# EAGLE board CT_schematic (EAGLE 7.6.0)

Size 100 x 80 mm. Coordinates in mm from the lower left corner, seen from the top.
Outline: 0,0 100,0 100,80 0,80 0,0
Copper layers (1*16): Top 0.035mm / dielectric 1.5mm / Bottom 0.035mm
Design rules "default": minimum track width 10mil, minimum drill 24mil, track to track 8mil, track to pad 8mil, pad to pad 8mil, via to via 8mil, smd to smd 8mil, copper to edge 40mil, drill to drill 8mil, minimum pad ring 10mil, minimum via ring 8mil, stop-mask expansion 4mil, vias tented up to drill 0mil, thermal gap 10mil

## Footprints (pad centres in the part's own frame; a part is rotated, then mirrored left to right if it is on the bottom)
C0603 = smd 0.8 x 0.8: 1 -0.762,0; 2 0.762,0
C0402 = smd 0.5 x 0.5: 1 -0.508,0; 2 0.508,0
C1210 = smd 1.2 x 2.5: 1 -1.524,0; 2 1.524,0
C0805 = smd 1.2 x 1.3: 1 -1.016,0; 2 1.016,0
EXV-9B = smd 2.718 x 1.778: 1 -2.108,0; 2 2.108,0
EXV-9H = smd 3.505 x 1.676: 1 -2.857,0; 2 2.857,0
L0603 = smd 0.8 x 0.8: 1 -0.762,0; 2 0.762,0
PJ-037B_PACKAGE = drill 3.7 square: 1 12,0 | drill 3.2 square: 2 6,0
R0603 = smd 0.8 x 0.8: 1 -0.762,0; 2 0.762,0
WLCSP66 = smd 0.229 x 0.229: A1 -1.6,1.6; A2 -1.2,1.6; A3 -0.8,1.6; A4 -0.4,1.6; A5 0,1.6; A6 0.4,1.6; A7 0.8,1.6; A8 1.2,1.6; A9 1.6,1.6; B1 -1.6,1.2; B2 -1.2,1.2; B3 -0.8,1.2; B4 -0.4,1.2; B5 0,1.2; B6 0.4,1.2; B7 0.8,1.2; B8 1.2,1.2; B9 1.6,1.2; C1 -1.6,0.8; C2 -1.2,0.8; C3 -0.8,0.8; C7 0.8,0.8; C8 1.2,0.8; C9 1.6,0.8; D1 -1.6,0.4; D2 -1.2,0.4; D3 -0.8,0.4; D7 0.8,0.4; D8 1.2,0.4; D9 1.6,0.4; E1 -1.6,0; E2 -1.2,0; E3 -0.8,0; E7 0.8,0; E8 1.2,0; E9 1.6,0; F1 -1.6,-0.4; F2 -1.2,-0.4; F3 -0.8,-0.4; F7 0.8,-0.4; F8 1.2,-0.4; F9 1.6,-0.4; G1 -1.6,-0.8; G2 -1.2,-0.8; G3 -0.8,-0.8; G7 0.8,-0.8; G8 1.2,-0.8; G9 1.6,-0.8; H1 -1.6,-1.2; H2 -1.2,-1.2; H3 -0.8,-1.2; H4 -0.4,-1.2; H5 0,-1.2; H6 0.4,-1.2; H7 0.8,-1.2; H8 1.2,-1.2; H9 1.6,-1.2; J1 -1.6,-1.6; J2 -1.2,-1.6; J3 -0.8,-1.6; J4 -0.4,-1.6; J5 0,-1.6; J6 0.4,-1.6; J7 0.8,-1.6; J8 1.2,-1.6; J9 1.6,-1.6
SAMTEC_FTSH-105-01-L-DV-K = smd 0.762 x 2.794: 1 -2.54,-2.032; 2 -2.54,2.032; 3 -1.27,-2.032; 4 -1.27,2.032; 5 0,-2.032; 6 0,2.032; 7 1.27,-2.032; 8 1.27,2.032; 9 2.54,-2.032; 10 2.54,2.032
QFN-28 = smd 0.813 x 0.305: 1 -2.451,1.5; 2 -2.451,1; 3 -2.451,0.5; 4 -2.451,0; 5 -2.451,-0.5; 6 -2.451,-1; 7 -2.451,-1.5; 15 2.451,-1.5; 16 2.451,-1; 17 2.451,-0.5; 18 2.451,0; 19 2.451,0.5; 20 2.451,1; 21 2.451,1.5 | smd 0.305 x 0.813: 8 -1.5,-2.451; 9 -1,-2.451; 10 -0.5,-2.451; 11 0,-2.451; 12 0.5,-2.451; 13 1,-2.451; 14 1.5,-2.451; 22 1.5,2.451; 23 1,2.451; 24 0.5,2.451; 25 0,2.451; 26 -0.5,2.451; 27 -1,2.451; 28 -1.5,2.451 | smd 3.607 x 3.607: 29 0,0
SJ-43515TS-SMT-TR = smd 2.2 x 3: 1 0.6,-7.4; 4 3.4,-7.4 | smd 3 x 3: 2 12.8,-7.4; 5 17,-3 | smd 2 x 3: 3 5.3,0; 6 2.5,0 | drill 1.8: P$7 4.5,-3.69; P$8 11.54,-3.69
ABS07-32.768KHZ-7-T = smd 1.1 x 2.4: 1 -2.5,0; 2 0,0
ABLS-25.000MHZ-B2F-T = smd 5.6 x 2.8: 1 -3.81,0; 2 5.69,0
ASFL1 = smd 1.7 x 1.5: 1 -1.27,-1.1; 2 1.27,-1.1; 3 1.27,1.1; 4 -1.27,1.1
LP2954 = smd 1.6 x 0.6: 1 -2.475,1.905 | smd 1.55 x 0.6: 2 -2.475,0.635; 3 -2.475,-0.635; 4 -2.475,-1.905; 5 2.475,-1.905; 6 2.475,-0.635; 7 2.475,0.635; 8 2.475,1.905
SON-6 = smd 0.55 x 0.3: 1 -0.355,0.5 | smd 0.52 x 0.3: 2 -0.37,0; 3 -0.37,-0.5; 4 0.37,-0.5; 5 0.37,0; 6 0.37,0.5
SW_4-1437565-2 = smd 1.4 x 2.1: 1 -2.23,4.55; 2 -2.23,-4.55; 3 2.23,4.55; 4 2.23,-4.55
LGM67K-G1J2-24-Z = smd 0.8 x 1.4: A -2,0; C 0,0
NC7SZ125M5X = smd 1.3 x 0.7: 1 -1.3,0.95; 2 -1.3,0; 3 -1.3,-0.95; 4 1.3,-0.95; 5 1.3,0.95
DUMMY_PACKAGE_157 = drill 0.3: 1 0,-1; 2 1.5,-1; 3 3,-1

## Placement (x,y rotation side)
C1  1e-06  [C0603]  -71.12,62.23 0 top  (outside the outline)
C2  1e-07  [C0603]  -74.93,62.23 0 top  (outside the outline)
C3  1e-07  [C0603]  -15.24,67.31 0 top  (outside the outline)
C4  1e-07  [C0603]  -19.05,67.31 0 top  (outside the outline)
C5  1e-07  [C0603]  -22.86,67.31 0 top  (outside the outline)
C6  1e-07  [C0603]  -26.67,67.31 0 top  (outside the outline)
C7  4.7e-06  [C0603]  -59.69,62.23 0 top  (outside the outline)
C8  1e-08  [C0603]  -30.48,67.31 0 top  (outside the outline)
C9  1e-06  [C0603]  -34.29,67.31 0 top  (outside the outline)
C10  2.2e-06  [C0603]  -63.5,62.23 0 top  (outside the outline)
C11  2.2e-06  [C0603]  -67.31,62.23 0 top  (outside the outline)
C12  1e-11  [C0402]  -60.96,67.31 0 top  (outside the outline)
C13  1e-11  [C0402]  -64.77,67.31 0 top  (outside the outline)
C14  1e-11  [C0402]  -68.58,67.31 0 top  (outside the outline)
C15  1e-11  [C0402]  -72.39,67.31 0 top  (outside the outline)
C16  1e-07  [C0402]  -15.24,72.39 0 top  (outside the outline)
C17  2.2e-05  [C1210]  -24.13,49.53 0 top  (outside the outline)
C18  2.2e-05  [C1210]  -30.48,49.53 0 top  (outside the outline)
C19  1e-09  [C0402]  -19.05,72.39 0 top  (outside the outline)
C20  1e-09  [C0402]  -22.86,72.39 0 top  (outside the outline)
C21  1e-07  [C0402]  -26.67,72.39 0 top  (outside the outline)
C22  1e-07  [C0402]  -30.48,72.39 0 top  (outside the outline)
C23  1e-07  [C0402]  -34.29,72.39 0 top  (outside the outline)
C24  1e-07  [C0402]  -38.1,72.39 0 top  (outside the outline)
C25  1e-07  [C0402]  -41.91,72.39 0 top  (outside the outline)
C26  1e-05  [C0805]  -67.31,49.53 0 top  (outside the outline)
C27  1e-05  [C0805]  -72.39,49.53 0 top  (outside the outline)
C28  1e-05  [C0805]  -15.24,57.15 0 top  (outside the outline)
C29  1e-05  [C0805]  -20.32,57.15 0 top  (outside the outline)
C30  1e-05  [C0805]  -25.4,57.15 0 top  (outside the outline)
C31  1e-08  [C0402]  -45.72,72.39 0 top  (outside the outline)
C32  1e-06  [EXV-9B]  -38.1,49.53 0 top  (outside the outline)
C33  2.2e-06  [EXV-9B]  -46.99,49.53 0 top  (outside the outline)
C34  1e-07  [C0402]  -49.53,72.39 0 top  (outside the outline)
C35  0.0001  [EXV-9H]  -55.88,33.02 0 top  (outside the outline)
C36  0.0001  [EXV-9H]  -67.31,33.02 0 top  (outside the outline)
C37  1e-08  [C0402]  -53.34,72.39 0 top  (outside the outline)
C38  1e-08  [C0402]  -57.15,72.39 0 top  (outside the outline)
F1  240.0  [L0603]  -38.1,67.31 0 top  (outside the outline)
J1  PJ-037B  [PJ-037B_PACKAGE]  -55.88,21.59 0 top  (outside the outline)
R2  1000.0  [R0603]  -41.91,67.31 0 top  (outside the outline)
R4  4700.0  [R0603]  -45.72,67.31 0 top  (outside the outline)
R5  10000.0  [R0603]  -60.96,55.88 0 top  (outside the outline)
R6  10000.0  [R0603]  -66.04,55.88 0 top  (outside the outline)
R7  10000.0  [R0603]  -71.12,55.88 0 top  (outside the outline)
R8  10000.0  [R0603]  -15.24,62.23 0 top  (outside the outline)
R9  10000.0  [R0603]  -20.32,62.23 0 top  (outside the outline)
R10  10000.0  [R0603]  -25.4,62.23 0 top  (outside the outline)
R11  10000.0  [R0603]  -30.48,62.23 0 top  (outside the outline)
R12  5.0  [R0603]  -49.53,67.31 0 top  (outside the outline)
R13  47000.0  [R0603]  -35.56,62.23 0 top  (outside the outline)
R14  47000.0  [R0603]  -40.64,62.23 0 top  (outside the outline)
R15  47000.0  [R0603]  -45.72,62.23 0 top  (outside the outline)
R16  680.0  [R0603]  -53.34,67.31 0 top  (outside the outline)
R17  100000.0  [R0603]  -35.56,55.88 0 top  (outside the outline)
R18  100000.0  [R0603]  -40.64,55.88 0 top  (outside the outline)
R19  164658.62  [R0603]  -30.48,55.88 0 top  (outside the outline)
R20  100000.0  [R0603]  -45.72,55.88 0 top  (outside the outline)
R21  10000.0  [R0603]  -50.8,62.23 0 top  (outside the outline)
R22  10000.0  [R0603]  -55.88,62.23 0 top  (outside the outline)
R23  9100.0  [R0603]  -57.15,67.31 0 top  (outside the outline)
R24  680000.0  [R0603]  -50.8,55.88 0 top  (outside the outline)
R25  120000.0  [R0603]  -55.88,55.88 0 top  (outside the outline)
U1  STM32F205RGY6  [WLCSP66]  -57.15,41.91 0 top  (outside the outline)
U2  FTSH-105-01-L-DV-K  [SAMTEC_FTSH-105-01-L-DV-K]  -35.56,7.62 0 top  (outside the outline)
U3  WM8731CLSEFL  [QFN-28]  -16.51,50.8 0 top  (outside the outline)
U4  SJ-43515TS-SMT-TR  [SJ-43515TS-SMT-TR]  -68.58,10.16 0 top  (outside the outline)
U5  SJ-43515TS-SMT-TR  [SJ-43515TS-SMT-TR]  -39.37,24.13 0 top  (outside the outline)
U6  ABS07-32.768KHZ-7-T  [ABS07-32.768KHZ-7-T]  -49.53,43.18 0 top  (outside the outline)
U7  ABLS-25.000MHZ-B2F-T  [ABLS-25.000MHZ-B2F-T]  -26.67,43.18 0 top  (outside the outline)
U8  ASFL1-12.288MHZ-EC-T  [ASFL1]  -46.99,34.29 0 top  (outside the outline)
U9  LP2954AIMX/NOPB  [LP2954]  -25.4,34.29 0 top  (outside the outline)
U10  TPS3895ADRYR  [SON-6]  -66.04,71.12 0 top  (outside the outline)
U11  4-1437565-2  [SW_4-1437565-2]  -72.39,21.59 0 top  (outside the outline)
U12  Q65110A2395  [LGM67K-G1J2-24-Z]  -66.04,41.91 0 top  (outside the outline)
U13  nc7sz125m5x  [NC7SZ125M5X]  -54.61,49.53 0 top  (outside the outline)
U14  nc7sz125m5x  [NC7SZ125M5X]  -60.96,49.53 0 top  (outside the outline)
U15  Dummy  [DUMMY_PACKAGE_157]  -63.5,72.39 0 top  (outside the outline)

## Library data of the parts
C1-C38 F1 J1 R2 R4-R25 U1-U15 = circuit_tree

## Nets
CLK_CRYSTAL_U1_B9: C12.1 U1.B9 U6.1
CLK_CRYSTAL_U1_C9: C13.1 U1.C9 U6.2
CLK_CRYSTAL_U1_E9: C14.1 U1.E9 U7.1
CLK_CRYSTAL_U1_F9: C15.1 U1.F9 U7.2
CLK_U3_1: U3.1 U8.3
GND: C1.2 C2.2 C3.2 C4.2 C5.2 C6.2 C7.2 C8.2 C9.2 C10.2 C11.2 C12.2 C13.2 C14.2 C15.2 C16.2 C20.2 C21.2 C22.2 C23.2 C24.2 C25.2 C26.2 C27.2 C28.2 C29.2 C30.2 C31.2 C32.2 C33.2 C34.2 C35.2 C36.2 C37.2 C38.2 J1.2 R2.2 R5.2 R6.2 R7.2 R11.2 R12.2 R13.2 R14.2 R15.2 R20.2 R23.2 R25.2 U1.B1 U1.D8 U1.F1 U1.H9 U2.3 U2.5 U3.4 U3.15 U3.19 U3.25 U3.26 U3.29 U4.1 U5.1 U8.2 U9.4 U10.2 U12.C U13.2 U13.3 U14.1 U14.3 U15.1
NET_U1_B6: R5.1 U1.B6
NET_U1_C2: C11.1 U1.C2
NET_U1_C8: R7.1 U1.C8
NET_U1_E8: R4.1 U1.E8 U14.4
NET_U1_F7: C8.1 C9.1 F1.1 U1.F7
NET_U1_H7: R6.1 U1.H7
NET_U1_J3: C10.1 U1.J3
NET_U1_J8: U12.A
NET_U1_J9: U11.3 U11.4
NET_U2_9: R12.1 U2.9
NET_U3_9: U3.9
NET_U3_20: C25.1 C30.1 U3.20
NET_U4_2: C18.1 R14.1 U4.2
NET_U4_5: C17.1 R13.1 U4.5
NET_U4_13: C17.2
NET_U4_14: C18.2
NET_U5_5: C19.1 C20.1 R15.1 R16.1 U5.5
NET_U5_21: R16.2
NET_U5_22: C19.2
NET_U9_3: R18.1 U9.3
NET_U9_5: R17.1 U9.5
NET_U9_7: R19.2 R20.1 U9.7
NET_U10_1: R22.1 R23.1 U10.1
NET_U10_3: R24.2 R25.1 U10.3
NET_U10_4: R21.1 U10.4 U13.4 U14.2
NET_U11_1: R2.1 U11.1 U11.2
PROC_ADC1_IN1: U1.H8 U15.2
PROC_ADC1_IN3: U1.G7 U15.3
PROC_I2S2_SCK: U1.H2 U3.7
PROC_I2S2_SD: U1.G1 U3.8
PROC_I2S2_WS: U1.A7 U3.9 U3.11
PROC_SYS_JTCK_SWCLK: R11.1 U1.A1 U2.4
PROC_SYS_JTDI: R9.1 U1.A2 U2.8
PROC_SYS_JTDO_SWO: U1.A4 U2.6
PROC_SYS_JTMS_SWDIO: R10.1 U1.B2 U2.2
RST_OUT_U2_JTAG_RST_B: R8.1 U2.10 U13.1
VCC_S1_7V0: C32.1 C35.1 C36.1 J1.1 R18.2 U9.8
VCC_TIER1_3V3: C1.1 C2.1 C3.1 C4.1 C5.1 C6.1 C7.1 C16.1 C21.1 C22.1 C23.1 C24.1 C26.1 C27.1 C28.1 C29.1 C31.1 C33.1 C34.1 C37.1 C38.1 F1.2 R4.2 R8.2 R9.2 R10.2 R17.2 R19.1 R21.2 R22.2 R24.1 U1.A8 U1.A9 U1.D9 U1.E1 U2.1 U3.3 U3.5 U3.12 U3.18 U8.4 U9.1 U10.6 U13.5 U14.5

## Tracks (layer width: path | path; a pad name or v marks a point on that pad's centre or on a via)
CLK_CRYSTAL_U1_B9  (2 unrouted)
CLK_CRYSTAL_U1_C9  (2 unrouted)
CLK_CRYSTAL_U1_E9  (2 unrouted)
CLK_CRYSTAL_U1_F9  (2 unrouted)
CLK_U3_1  (1 unrouted)
GND  (70 unrouted)
NET_U1_B6  (1 unrouted)
NET_U1_C2  (1 unrouted)
NET_U1_C8  (1 unrouted)
NET_U1_E8  (2 unrouted)
NET_U1_F7  (3 unrouted)
NET_U1_H7  (1 unrouted)
NET_U1_J3  (1 unrouted)
NET_U1_J9  (1 unrouted)
NET_U2_9  (1 unrouted)
NET_U3_20  (2 unrouted)
NET_U4_2  (2 unrouted)
NET_U4_5  (2 unrouted)
NET_U5_5  (4 unrouted)
NET_U9_3  (1 unrouted)
NET_U9_5  (1 unrouted)
NET_U9_7  (2 unrouted)
NET_U10_1  (2 unrouted)
NET_U10_3  (2 unrouted)
NET_U10_4  (3 unrouted)
NET_U11_1  (2 unrouted)
PROC_ADC1_IN1  (1 unrouted)
PROC_ADC1_IN3  (1 unrouted)
PROC_I2S2_SCK  (1 unrouted)
PROC_I2S2_SD  (1 unrouted)
PROC_I2S2_WS  (2 unrouted)
PROC_SYS_JTCK_SWCLK  (2 unrouted)
PROC_SYS_JTDI  (2 unrouted)
PROC_SYS_JTDO_SWO  (1 unrouted)
PROC_SYS_JTMS_SWDIO  (2 unrouted)
RST_OUT_U2_JTAG_RST_B  (2 unrouted)
VCC_S1_7V0  (5 unrouted)
VCC_TIER1_3V3  (44 unrouted)